# Altium PCB Fused_485.PcbDoc
Units mil, origin at the board's own origin, x right, y up, seen from the top; angles counter-clockwise.
Board outline 24000 x 20000 mil, 2 copper layers (Top Layer, Bottom Layer); 25 components, 23 nets, 105 pads, 12 vias.
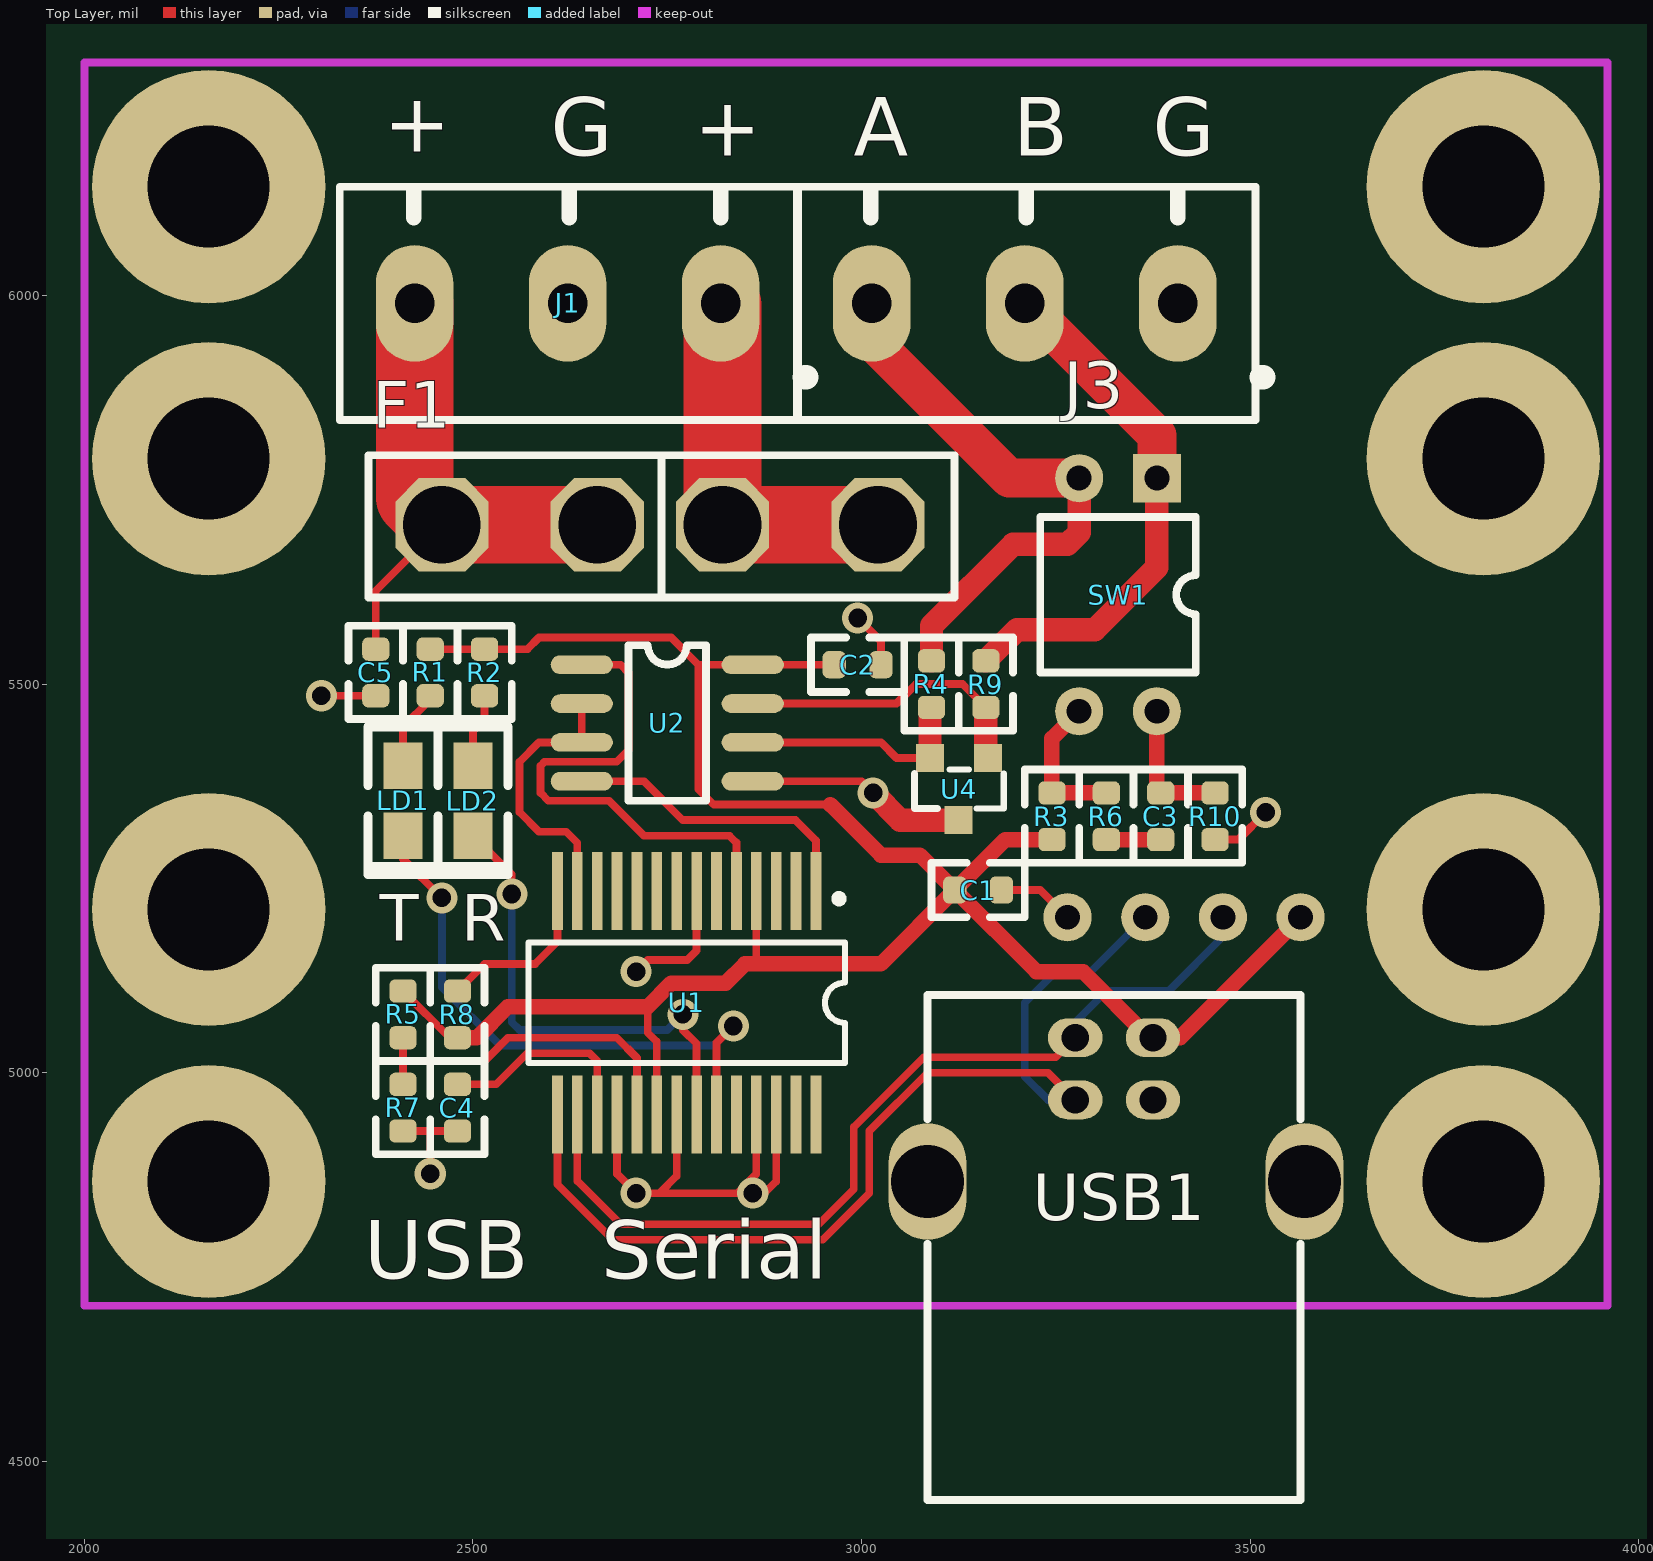
[diagram p0: Top Layer view]
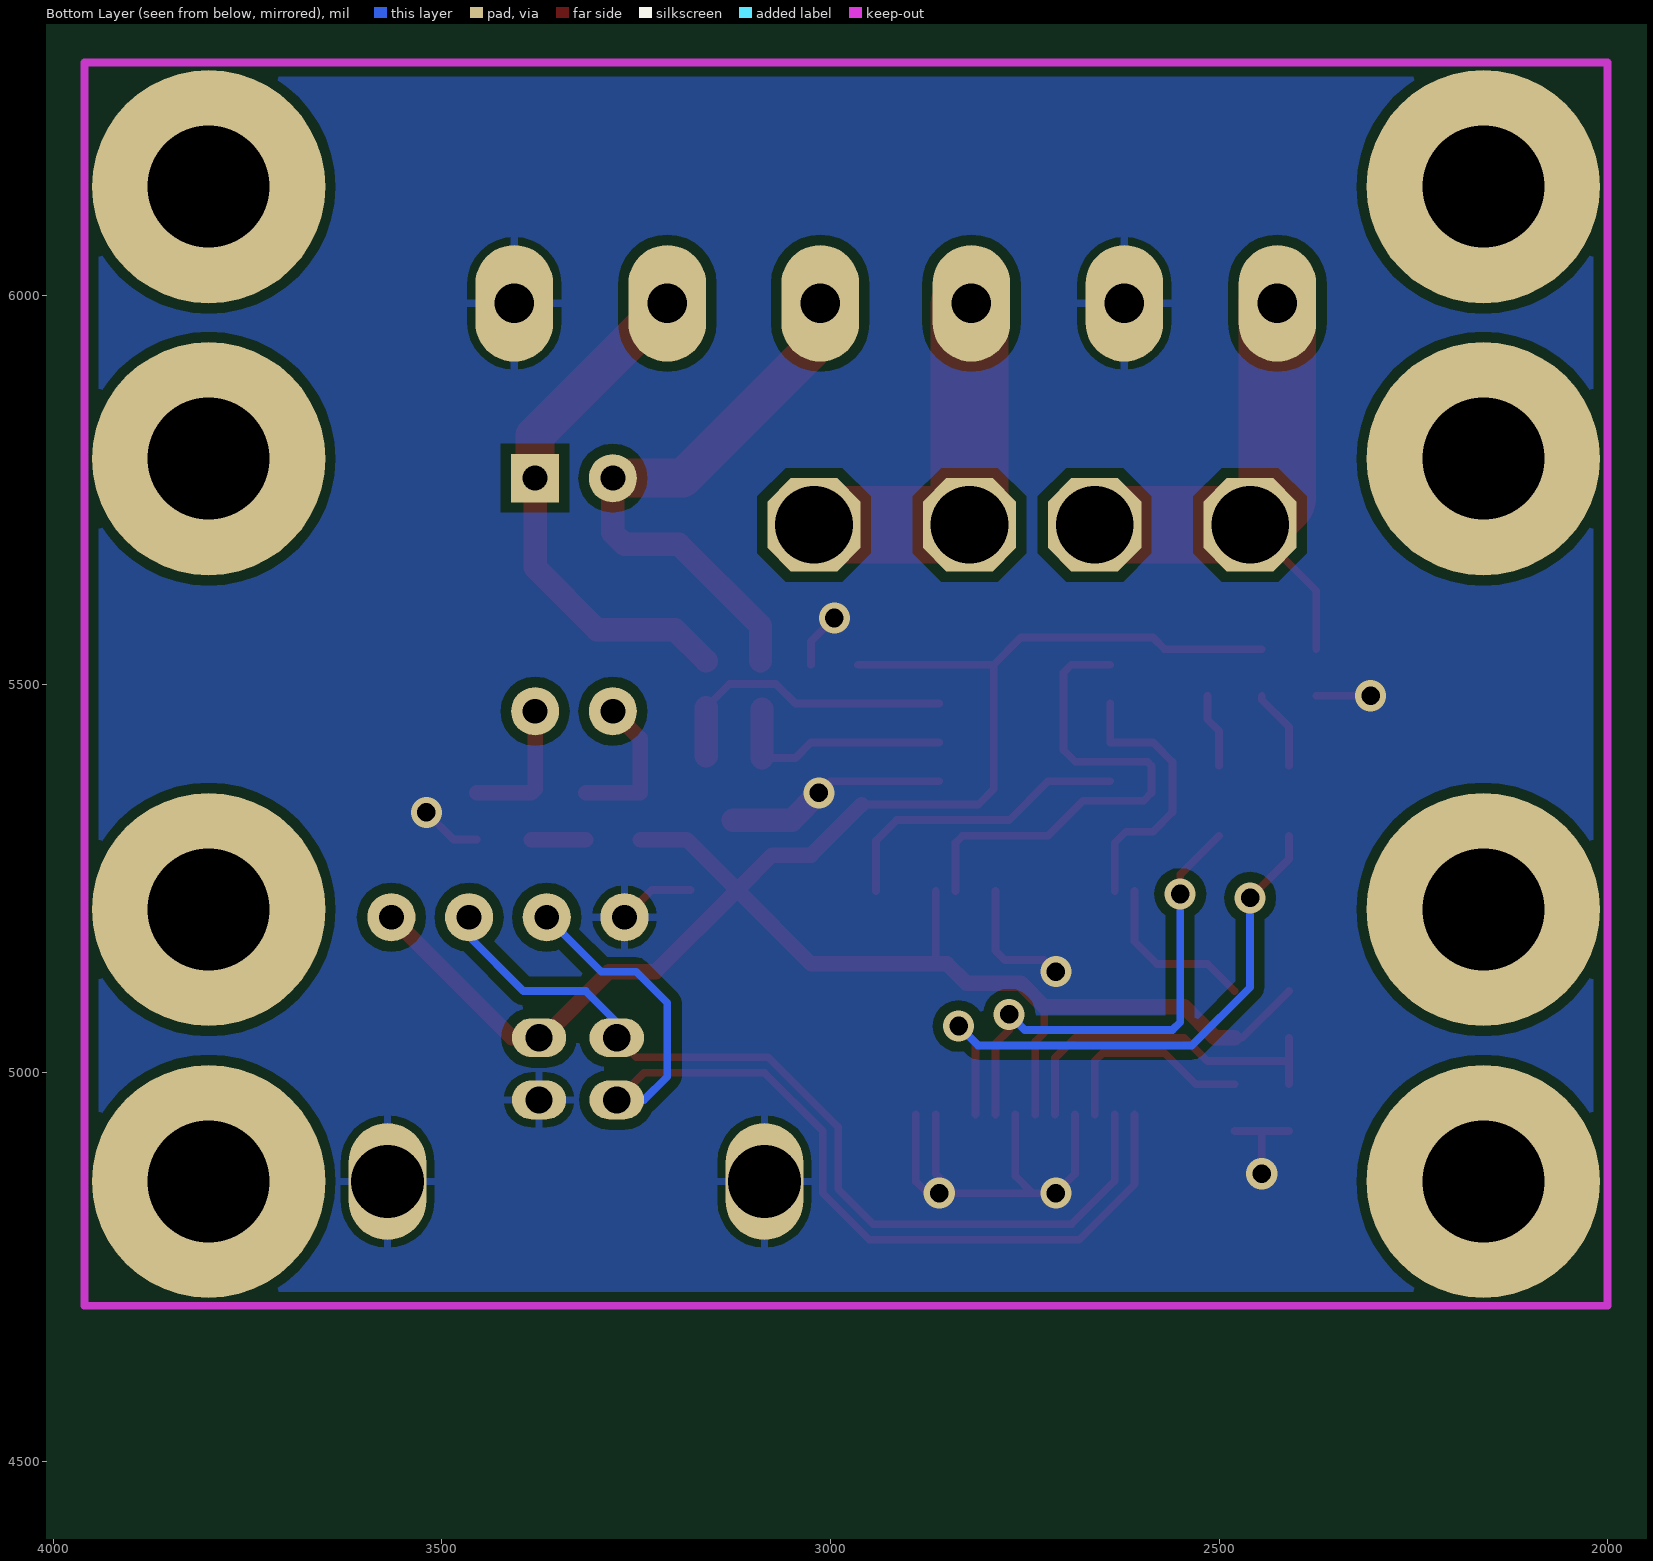
[diagram p1: Bottom Layer view, seen from below]

## Layer stack, top to bottom
Top Layer: signal copper 1.4
Dielectric: dielectric 12.6, FR-4, Dk 4.8
Bottom Layer: signal copper 1.4

## Board outline
0,0 24000,0 24000,20000 0,20000

## Design rules (kind name [scope] priority, off if disabled: settings)
Clearance Clearance_poly [InPoly] p1: gap=13
Clearance [All] p2: gap=7
ComponentClearance [All] p1 off: gap=10 collisioncheckmode=3 verticalgap=10 showdistances=FALSE
FabricationTestPointUsage TestPointUsage [All] p1: valid=0 allowmultiple=FALSE
FabricationTestpoint Testpoint [All] p1: side=3 testpointundercomponent=TRUE minsize=40 maxsize=100 preferedsize=60 minholesize=0 maxholesize=40 preferedholesize=32 testpointgrid=1 allowsidetop=TRUE allowsidebottom=TRUE usegrid=TRUE gridtolerance=0.01
HoleSize [All] p1: absolutevalues=TRUE maxlimit=300 minlimit=24 maxpercent=80.000 minpercent=20.000
MinimumAnnularRing [All] p1: minimumring=8
PlaneClearance [All] p1: clearance=12
PolygonConnect PolygonConnect_via [IsVia] p1: connectstyle=Direct reliefconductorwidth=10 reliefentries=4 polygonreliefangle="90 Angle" airgapwidth=10
PolygonConnect [All] p2: connectstyle=Relief reliefconductorwidth=10 reliefentries=4 polygonreliefangle="90 Angle" airgapwidth=10
RoutingVias [All] p1: holewidth=24 width=40 viastyle="Through Hole" minholewidth=24 minwidth=35 maxholewidth=28 maxwidth=50
SilkscreenOverComponentPads [All vs (IsText AND OnLayer('Top Overlay'))] p1: minsilkscreentomaskgap=10
SolderMaskExpansion [All] p1: expansion=4
Width [All] p1: maxlimit=150 minlimit=10 preferedwidth=10
22 further rules are at their usual default settings.

## Components (designator, comment, footprint, x,y, rotation, side; value= is the part's Value field where it differs from the comment)
C1 "100n" 0603 3180,5235 r180 top
C2 "100n" 0603 2965,5525 r0 top
C3 "4n7" 0603 3385,5300 r90 top
C4 "100n" 0603 2480,4925 r90 top
C5 "100n" 0603 2375,5545 r270 top
F1 "FUSE2" Fuse_auto 2396.22,5705 r180 top
J1 "Terms5mm3" TERMS5mm3 2818.7,5990 r180 top
J3 "Terms5mm3" TERMS5mm3 3406.85,5990 r180 top
LD1 "GRN" 0805DIODE 2410,5305 r90 top
LD2 "YEL" 0805DIODE 2500,5305 r90 top
R1 "330R" 0603 2445,5545 r270 top
R2 "330R" 0603 2515,5545 r270 top
R3 "1k" 0603 3245,5300 r90 top
R4 "10R" 0603 3090,5470 r90 top
R5 "4k7" 0603 2410,5105 r270 top
R6 "120R" 0603 3315,5300 r90 top
R7 "10k" 0603 2410,4925 r90 top
R8 "10k" 0603 2480,5045 r90 top
R9 "10R" 0603 3160,5470 r90 top
R10 "1k" 0603 3455,5360 r270 top
SW1 "SW-DIP2" DIP4 3380,5765 r270 top
U1 "FT232R" SSOP28W-handsolder 2775,5090 r180 top
U2 "MAX3483ECSA" so-8 2640,5525 r0 top
U4 "SM712" SOT-23 3163,5405 r180 top
USB1 "USB-B" USB_B 3375,5045 r0 top

## Footprints (in the part's own frame and the unit in brackets; to place one, negate y for a bottom-side part, rotate by r counter-clockwise, add the part's x,y. Pads: shape width x height; smd on the part's side, far side on the other; paste and mask are expansions set on the pad)
0603 [mil]
  rrect50% 30x35 smd: 1(0,0) 2(60,0)
  silkscreen extent -30,-35 90,35
0805DIODE [mil]
  rect 60x50 smd: A(90,0) K(0,0)
  silkscreen extent -50,-45 140,45
DIP4 [mil]
  rect 62x62 hole 32: 1(0,0)
  round 62 hole 32: 2(0,-100) 3(300,-100) 4(300,0)
  silkscreen extent 50,-150 250,50
Fuse_auto [mil]
  oct 120x120 hole 100: 1(-625,0) 1(-425,0) 2(-263.78,0) 2(-63.78,0)
  silkscreen extent -723,-90 31,94
so-8 [mil]
  oval 80x24 smd: 1(0,0) 2(0,-50) 3(0,-100) 4(0,-150) 5(220,-150) 6(220,-100) 7(220,-50) 8(220,0)
  silkscreen extent 60,-175 160,25
SOT-23 [mil]
  rect 36x36 smd: 1(0,0) 2(75,0) 3(38,80)
  silkscreen extent -20,15 95,65
SSOP28W-handsolder [mm]
  rect 0.35x2.55 smd: 1(-4.225,-3.65) 2(-3.575,-3.65) 3(-2.925,-3.65) 4(-2.275,-3.65) 5(-1.625,-3.65) 6(-0.975,-3.65) 7(-0.325,-3.65) 8(0.325,-3.65) 9(0.975,-3.65) 10(1.625,-3.65) 11(2.275,-3.65) 12(2.925,-3.65) 13(3.575,-3.65) 14(4.225,-3.65) 15(4.225,3.65) 16(3.575,3.65) 17(2.925,3.65) 18(2.275,3.65) 19(1.625,3.65) 20(0.975,3.65) 21(0.325,3.65) 22(-0.325,3.65) 23(-0.975,3.65) 24(-1.625,3.65) 25(-2.275,3.65) 26(-2.925,3.65) 27(-3.575,3.65) 28(-4.225,3.65)
  silkscreen extent -5.18,-3.52 5.17,1.98
TERMS5mm3 [mil]
  oval 100x150 hole 51: 1(0,0) 2(196.85,0) 3(393.7,0)
  silkscreen extent -110,-150 490,150
USB_B [mil]
  oval 100x150 hole 94: 0(-290,-185) 0(195,-185)
  oval 70x50 hole 35: 1(0,0) 2(-100,0) 3(-100,-80) 4(0,-80)
  silkscreen extent -290,-595 190,55

## Part data
C1 C2 C3 C4 C5: library part CAP
J1 J3: library part CON3
LD1 LD2: library part LED
R1 R2 R3 R4 R5 R6 R7 R8 R9 R10: library part RES8
U2: library part MAX487, "RS485 Transceiver"
U4: "RS485 Transorb"

## Free pads (board coordinates)
  round 62 hole 32: 0(3365,5200) 1(3565,5200) 2(3465,5200) 3(3265,5200)
  round 300 hole 157 paste+0: ""(2160,4860) ""(2160,5210) ""(2160,5790) ""(2160,6140) ""(3800,4860) ""(3800,5210) ""(3800,5790) ""(3800,6140)

## Via types
v1: diameter 40, hole 24, Top Layer to Bottom Layer, tented both sides, 12 vias

## Nets (pads, with @x,y where several pads share a name; then routed paths per layer and width w, separated by ;. In a path a pad name is that pad's centre, name@x,y a point inside that pad or via, vN(x,y) a via of type N, cw(c..) or ccw(c..) an arc to the next point about the centre after c; other vN are vias at no path point)
GND: C1.1 C2.2 C4.1 C5.2 J1.2 J3.1 pad.3 R7.1 R10.2 U1.7 U1.18 U1.21 U1.25 U1.26 U2.5 U4.3 USB1.0 USB1.4 | length 1503.7
  Top Layer w10: v1(2305,5485) C5.2 ; R7.1 2445,4925 ; v1(2445,4870) 2445,4925 ; C4.1 2445,4925 ; U1.18 2685.43,4869.57 v1(2710,4845) 2740,4845 ; v1(2710,5130) 2725,5145 2775.59,5145 2787.8,5157.2 U1.7 ; U1.21 2762.2,4867.2 2740,4845 ; U2.5 3000,5375 v1(3015,5360) ; U1.25 2864.57,4869.57 v1@2840,4845 ; U1.26 2890.16,4860.16 2875,4845 v1@2840,4845 ; v1(2995,5585) 3025,5555 C2.2 ; C1.1 3230,5235 pad.3 ; R10.2 3485,5300 v1(3520,5335) ; 2740,4845 v1@2840,4845
  Top Layer w30: v1(3015,5360) 3050,5325 U4.3
  other v1: 2860,4845
NetC3_1: C3.1 R6.1 | length 70
  Top Layer w20: R6.1 C3.1
NetC3_2: C3.2 R10.1 SW1.4 | length 177.1
  Top Layer w20: SW1.4 3380,5365 C3.2 R10.1
NetC4_2: C4.2 U1.17 | length 269.3
  Top Layer w10: C4.2 2530,4985 2570,5025 2650,5025 2659.84,5015.16 U1.17
NetC5_1: C5.1 F1.2 J1.3 | length 694.7
  Top Layer w10: C5.1 2375,5620 F1.2@2460,5705
  Top Layer w100: J1.3 2425,5740 2460,5705 F1.2@2660,5705
NetF1_1: F1.1 J1.1 | length 486
  Top Layer w50: J1.1 J1.1@2821.22,5987.48
  Top Layer w100: J1.1@2821.22,5987.48 2821.22,5705 F1.1@3021.22,5705
NetLD1_A: LD1.A R1.2 | length 104.5
  Top Layer w10: LD1.A 2410,5445 2445,5480 R1.2
NetLD2_A: LD2.A R2.2 | length 96.2
  Top Layer w10: LD2.A 2500,5440 2515,5455 R2.2
NetR3_2: R3.2 R6.2 SW1.3 | length 189.5
  Top Layer w20: SW1.3 3245,5430 R3.2 R6.2
NetR4_1: R4.1 U2.6 U4.2 | length 299.3
  Top Layer w10: U2.6 3025,5425 3045,5405 U4.2
  Top Layer w30: U4.2 R4.1@3088,5468
NetR5_2: R5.2 R7.2 U1.19 | length 456.9
  Top Layer w10: R7.2 2410,5015 ; R5.2 2410,5015 ; U1.19 2711.02,5018.98 2685,5045 2545,5045 2515,5015 2410,5015
NetR9_1: R9.1 U2.7 U4.1 | length 389
  Top Layer w10: U2.7 3045,5475 3070,5500 3130,5500 R9.1 ; U4.1@3160,5408 U4.1
  Top Layer w30: U4.1@3160,5408 R9.1
RS485A: J3.3 R4.2 SW1.2 | length 743
  Top Layer w30: R4.2 3090,5575 3195,5680 3265,5680 3280,5695 SW1.2
  Top Layer w50: J3.3 3013.15,5941.85 3190,5765 SW1.2
RS485B: J3.2 R9.2 SW1.1 | length 680.1
  Top Layer w30: R9.2 3200,5570 3300,5570 3380,5650 SW1.1
  Top Layer w50: J3.2 3380,5820 SW1.1
RXD: U1.5 U2.1 | length 661.2
  Top Layer w10: U2.1 2690,5525 2700,5515 2700,5415 2685,5400 2592,5400 2587,5395 2587,5360 2597,5350 2675,5350 2720,5305 2830,5305 2838.98,5296.02 U1.5
RXD_LED: LD2.K U1.22 | length 629.2
  Top Layer w10: LD2.K 2550,5255 v1(2550,5230) ; v1(2770,5075) 2770,5055 2787.8,5037.2 U1.22
  Bottom Layer w10: v1(2550,5230) 2550,5065 2560,5055 2750,5055 v1(2770,5075)
RXEN: R8.2 U1.14 | length 220.1
  Top Layer w10: R8.2 2515,5140 2580,5140 2608.66,5168.66 U1.14
TXD: U1.1 U2.4 | length 397.9
  Top Layer w10: U2.4 2720,5375 2770,5325 2915,5325 2941.34,5298.66 U1.1
TXD_LED: LD1.K U1.23 | length 754.8
  Top Layer w10: LD1.K 2410,5275 v1(2460,5225) ; U1.23 2813.39,5038.39 v1(2835,5060)
  Bottom Layer w10: v1(2460,5225) 2460,5110 2535,5035 2810,5035 v1(2835,5060)
TXEN: U1.13 U2.2 U2.3 | length 357.9
  Top Layer w10: U1.13 2634.25,5295.75 2620,5310 2585,5310 2560,5335 2560,5400 2585,5425 U2.3 U2.2
USB_DM: pad.2 U1.16 USB1.2 | length 1176.2
  Top Layer w10: U1.16 2634.25,4860.75 2690,4805 2945,4805 2990,4850 2990,4930 3080,5020 3250,5020 USB1.2
  Bottom Layer w10: USB1.2 3275,5065 3315,5105 3395,5105 3465,5175 pad.2
USB_DP: pad.0 U1.15 USB1.3 | length 1309.3
  Top Layer w10: U1.15 2608.66,4856.34 2680,4785 2950,4785 3010,4845 3010,4925 3085,5000 3240,5000 USB1.3
  Bottom Layer w10: USB1.3 3240,4965 3210,4995 3210,5090 3250,5130 3295,5130 pad.0
VCC: C1.2 C2.1 pad.1 R1.1 R2.1 R3.1 R5.1 R8.1 U1.4 U1.20 U2.8 USB1.1 | length 2882.4
  Top Layer w10: R5.1 2470,5045 R8.1 ; R1.1 R2.1 2570,5545 2585,5560 2755,5560 2790,5525 ; 2725,5085 2725,5051.61 2736.61,5040 U1.20 ; 2864.13,5140 2864.57,5140.43 U1.4 ; 2960,5345 2810,5345 2790,5365 2790,5525 ; C2.1 U2.8 2790,5525 ; 3020,5135 3025,5140
  Top Layer w20: R8.1 2505,5045 2545,5085 2725,5085 2755,5115 2825,5115 2850,5140 2864.13,5140 3025,5140 C1.2 ; 2960,5345 3025,5280 3075,5280 C1.2 ; R3.1 3185,5300 C1.2 ; pad.1 3410,5045 USB1.1 3370,5045 3285,5130 3225,5130 C1.2
pads on no net: U1.2 U1.3 U1.6 U1.8 U1.9 U1.10 U1.11 U1.12 U1.24 U1.27 U1.28

## Polygon pours and split planes (outlines as drawn)
GND on Bottom Layer "GND" (solid, remove dead copper, pour order 2): 2000,4700 3960,4700 3960,6300 2000,6300

## Keep-outs
Keep-Out Layer:
  lines w10: 2000,4700 3960,4700 3960,6300 2000,6300 2000,4700

## Silkscreen, mask and mechanical layers (free items; w line width, h text height)
Top Overlay:
  text "+" at 2385,6185 h75
  text "G" at 2600,6180 h75
  text "+" at 2785,6180 h75
  text "A" at 2990,6180 h75
  text "B" at 3195,6180 h75
  text "G" at 3375,6180 h75
  text "T" at 2380,5170 h60
  text "R" at 2485,5170 h60
  text "USB" at 2360,4735 h75
  text "Serial" at 2665,4735 h75
Mechanical 1:
  lines w10: 2000,4700 3960,4700 3960,6300 2000,6300 2000,4700
Mechanical 3:
  lines w10: 2328.7,4775 2328.7,6140 ; 3506.85,4870 3506.85,6140 ; 2160,4860 2160,6140 3675,6140 3675,4860 2160,4860

## Dimensions
2000,4700 to 2000,6300 on Mechanical 3
2000,4700 to 3960,4700 on Mechanical 3